# EAGLE board Copy of Medidor de pilhas (EAGLE 9.7.0)

Size 150.98 x 172.26 mm. Coordinates in mm from the lower left corner, seen from the top.
Outline: 0,0 150.98,0 150.98,172.26 0,172.26 0,0
Copper layers (1*16): Top 0.035mm / dielectric 1.5mm / Bottom 0.035mm
Design rules "default": minimum track width 6mil, minimum drill 0.35mm, track to track 6mil, track to pad 6mil, pad to pad 6mil, via to via 6mil, smd to smd 6mil, copper to edge 40mil, drill to drill 6mil, minimum pad ring 10mil, minimum via ring 8mil, stop-mask expansion 4mil, vias tented up to drill 0mil, thermal gap 10mil

## Footprints (pad centres in the part's own frame; a part is rotated, then mirrored left to right if it is on the bottom)
BATTERY-GENERIC = drill 1.118 pad 3.15 octagon: + 2.54,0; - -2.54,0
DIODE-AXIAL = drill 1: 1 -5.08,0; 2 5.08,0
RESAD1016W63L850D250B = drill 0.83 pad 1.43: 1 -5.08,0; 2 5.08,0
SWITCH-SPDT-PTH-8.5X3.7MM = drill 1.016 pad 1.88: 1 -2.54,0; 2 0,0; 3 2.54,0
SWITCH-MOMENTARY-PTH-6.5MM = drill 1.016 pad 1.88: 1 -3.251,2.261; 2 3.251,2.261; 3 -3.251,-2.261; 4 3.251,-2.261
ARDUINO-UNO-R3-SHIELD = drill 1.016 pad 1.88: 3.3V 24.13,-2.54; 5V 24.13,0; A0 24.13,12.7; A1 24.13,15.24; A2 24.13,17.78; A3 24.13,20.32; A4 24.13,22.86; A5 24.13,25.4; AREF -24.13,-13.97; D2 -24.13,20.32; D3 -24.13,17.78; D4 -24.13,15.24; D5 -24.13,12.7; D6 -24.13,10.16; D7 -24.13,7.62; D8 -24.13,3.81; D9 -24.13,1.27; D10 -24.13,-1.27; D11 -24.13,-3.81; D12 -24.13,-6.35; D13 -24.13,-8.89; GND@0 24.13,2.54; GND@1 24.13,5.08; GND@2 -24.13,-11.43; IOREF 24.13,-7.62; NC 24.13,-10.16; RES 24.13,-5.08; RX -24.13,25.4; SCL -24.13,-19.05; SDA -24.13,-16.51; TX -24.13,22.86; VIN 24.13,7.62
LCD-I2C = drill 1.016 long: 1 -19.05,-5.08; 2 -19.05,-7.62; 3 -19.05,-10.16; 4 -19.05,-12.7
DIP762W53P254L1969H508Q14B = drill 0.743 pad 1.343: 1 -3.81,7.62; 2 -3.81,5.08; 3 -3.81,2.54; 4 -3.81,0; 5 -3.81,-2.54; 6 -3.81,-5.08; 7 -3.81,-7.62; 8 3.81,-7.62; 9 3.81,-5.08; 10 3.81,-2.54; 11 3.81,0; 12 3.81,2.54; 13 3.81,5.08; 14 3.81,7.62
DIP826W53P254L959H508Q8B = drill 0.786 pad 1.386: 1 -4.13,3.81; 2 -4.13,1.27; 3 -4.13,-1.27; 4 -4.13,-3.81; 5 4.13,-3.81; 6 4.13,-1.27; 7 4.13,1.27; 8 4.13,3.81

## Placement (x,y rotation side)
BAT1  9V  [BATTERY-GENERIC]  142.72,72.56 180 top
BAT2  1.5V  [BATTERY-GENERIC]  8.26,69.42 0 top
D3  DIODEDIODE-AXIAL  [DIODE-AXIAL]  88.38,40.3 270 top
D4  DIODEDIODE-AXIAL  [DIODE-AXIAL]  98.54,40.3 270 top
R1  1M  [RESAD1016W63L850D250B]  57.9,60.62 90 top
R10  2.2k  [RESAD1016W63L850D250B]  73.14,42.84 90 top
R11  1k  [RESAD1016W63L850D250B]  78.22,42.84 90 top
R12  1k  [RESAD1016W63L850D250B]  85.84,25.06 90 top
R13  1k  [RESAD1016W63L850D250B]  96,25.06 90 top
R14  1k  [RESAD1016W63L850D250B]  106.16,25.06 90 top
R15  220  [RESAD1016W63L850D250B]  55.36,25.06 90 top
R17  1k  [RESAD1016W63L850D250B]  62.98,42.84 90 top
R18  1k  [RESAD1016W63L850D250B]  68.06,42.84 90 top
S1  TOGGLE  [SWITCH-SPDT-PTH-8.5X3.7MM]  70.63,6.99 180 top
S2  SWITCH_MOMENTARY  [SWITCH-MOMENTARY-PTH-6.5MM]  103.62,41.57 90 top
S3  SWITCH_MOMENTARY  [SWITCH-MOMENTARY-PTH-6.5MM]  93.46,41.57 90 top
S5  SWITCH_MOMENTARY  [SWITCH-MOMENTARY-PTH-6.5MM]  83.3,41.57 90 top
U5  ARDUINO-UNO-R3-SHIELD  [ARDUINO-UNO-R3-SHIELD]  65.21,97.61 270 top
U6  LCD-16X2-I2CSUNFOUNDER-IIC  [LCD-I2C]  77.65,164.72 0 top
U7  74HC32_PDIP  [DIP762W53P254L1969H508Q14B]  40.12,41.57 90 top
U8  OPAMP_DIP  [DIP826W53P254L959H508Q8B]  56.63,41.57 90 top

## Library data of the parts
BAT1 BAT2 D3 D4 R1 R10-R15 R17 R18 S1-S3 S5 U5-U8 = Tinkercad

## Nets
BAT1+: BAT1.+ R10.1
BAT1-: BAT1.- S1.1
BAT2+: BAT2.+ R18.1 U5.A0 U8.3
BAT2-: BAT2.- S1.3
U5_5V: S2.1 S2.2 S3.1 S3.2 S5.1 S5.2 U5.5V U6.2 U7.14
U5_A2: R10.2 R11.2 U5.A2 U7.9
U5_A4: U5.A4 U5.SDA U6.3
U5_A5: U5.A5 U6.4
U5_D4: D3.2 R12.2 S5.3 S5.4 U5.D4
U5_D5: R13.2 S3.3 S3.4 U5.D5
U5_D6: D4.2 R14.2 S2.3 S2.4 U5.D6
U5_D7: U5.D7 U8.7
U5_GND: R1.2 R11.1 R12.1 R13.1 R14.1 R15.1 R18.2 S1.2 U5.GND@0 U5.GND@1 U5.GND@2 U6.1 U7.7 U7.10 U7.13 U8.4
U7_3Y: D4.1 U7.8
U7_4Y: D3.1 U7.11
U8_-IN: R15.2 R17.1 U8.2
U8_OUT: R1.1 R17.2 U7.12 U8.6

## Tracks (layer width: path | path; a pad name or v marks a point on that pad's centre or on a via)
BAT1+  (1 unrouted)
BAT1-  (1 unrouted)
BAT2+  (3 unrouted)
BAT2-  (1 unrouted)
U5_5V  (8 unrouted)
U5_A2  (3 unrouted)
U5_A4  (2 unrouted)
U5_A5  (1 unrouted)
U5_D4  (4 unrouted)
U5_D5  (3 unrouted)
U5_D6  (4 unrouted)
U5_D7  (1 unrouted)
U5_GND  (15 unrouted)
U7_3Y  (1 unrouted)
U7_4Y  (1 unrouted)
U8_-IN  (2 unrouted)
U8_OUT  (3 unrouted)